# EAGLE board CT_schematic (EAGLE 7.6.0)

Size 100 x 80 mm. Coordinates in mm from the lower left corner, seen from the top.
Outline: 0,0 100,0 100,80 0,80 0,0
Copper layers (1*16): Top 0.035mm / dielectric 1.5mm / Bottom 0.035mm
Design rules "default": minimum track width 10mil, minimum drill 24mil, track to track 8mil, track to pad 8mil, pad to pad 8mil, via to via 8mil, smd to smd 8mil, copper to edge 40mil, drill to drill 8mil, minimum pad ring 10mil, minimum via ring 8mil, stop-mask expansion 4mil, vias tented up to drill 0mil, thermal gap 10mil

## Footprints (pad centres in the part's own frame; a part is rotated, then mirrored left to right if it is on the bottom)
C0603 = smd 0.8 x 0.8: 1 -0.762,0; 2 0.762,0
C0402 = smd 0.5 x 0.5: 1 -0.508,0; 2 0.508,0
C1210 = smd 1.2 x 2.5: 1 -1.524,0; 2 1.524,0
C1206 = smd 1.3 x 1.6: 1 -1.524,0; 2 1.524,0
L0603 = smd 0.8 x 0.8: 1 -0.762,0; 2 0.762,0
R0603 = smd 0.8 x 0.8: 1 -0.762,0; 2 0.762,0
UFQFPN32 = smd 0.6 x 0.3: 1 -2.35,1.75; 2 -2.35,1.25; 3 -2.35,0.75; 4 -2.35,0.25; 5 -2.35,-0.25; 6 -2.35,-0.75; 7 -2.35,-1.25; 8 -2.35,-1.75; 17 2.35,-1.75; 18 2.35,-1.25; 19 2.35,-0.75; 20 2.35,-0.25; 21 2.35,0.25; 22 2.35,0.75; 23 2.35,1.25; 24 2.35,1.75 | smd 0.3 x 0.6: 9 -1.75,-2.35; 10 -1.25,-2.35; 11 -0.75,-2.35; 12 -0.25,-2.35; 13 0.25,-2.35; 14 0.75,-2.35; 15 1.25,-2.35; 16 1.75,-2.35; 25 1.75,2.35; 26 1.25,2.35; 27 0.75,2.35; 28 0.25,2.35; 29 -0.25,2.35; 30 -0.75,2.35; 31 -1.25,2.35; 32 -1.75,2.35 | smd 3.45 x 3.45: EPAD 0,0
TDFN-8/6MM = smd 0.3 x 0.75: 1 0,0; 2 0.5,0; 3 1,0; 4 1.5,0; 5 1.5,3; 6 1,3; 7 0.5,3; 8 0,3
FCI_10118193-0001LF = smd 0.4 x 1.35: 1 -1.3,2.675; 2 -0.65,2.675; 3 0,2.675; 4 0.65,2.675; 5 1.3,2.675 | smd 1.6 x 1.4: 6 -3.2,2.45; 7 3.2,2.45 | smd 1.9 x 1.9: 8 -1.2,0; 9 1.2,0 | hole 0.5: -3.3,0; 3.3,0
SOT143B = smd 1 x 0.7: 1 -0.75,-1 | smd 0.6 x 0.7: 2 0.95,-1; 3 0.95,1; 4 -0.95,1
ASEK = smd 1.4 x 1: 1 -1.1,-0.8; 2 1.1,-0.8; 3 1.1,0.8; 4 -1.1,0.8
SOIC-8_EP = smd 1.6 x 0.533: 1 -2.921,1.905; 2 -2.921,0.635; 3 -2.921,-0.635; 4 -2.921,-1.905; 5 2.921,-1.905; 6 2.921,-0.635; 7 2.921,0.635; 8 2.921,1.905 | smd 2.54 x 3.302: EPAD 0,0 | drill 0.406 pad 0.406: P$1 -0.508,0.635; P$2 0.381,0.635; P$3 -0.508,-0.635; P$4 0.381,-0.635
DFN8_2X3MC = smd 0.813 x 0.305: 1 -1.398,0.75; 2 -1.398,0.25; 3 -1.398,-0.25; 4 -1.398,-0.75; 5 1.398,-0.75; 6 1.398,-0.25; 7 1.398,0.25; 8 1.398,0.75 | smd 1.753 x 1.549: 9 0,0
JST-2-SMD = smd 1 x 4.6: 1 -1,-3.7; 2 1,-3.7 | smd 1.6 x 3.4: NC1 -3.4,1.5; NC2 3.4,1.5
SON-6 = smd 0.55 x 0.3: 1 -0.355,0.5 | smd 0.52 x 0.3: 2 -0.37,0; 3 -0.37,-0.5; 4 0.37,-0.5; 5 0.37,0; 6 0.37,0.5
SW_4-1437565-2 = smd 1.4 x 2.1: 1 -2.23,4.55; 2 -2.23,-4.55; 3 2.23,4.55; 4 2.23,-4.55
LGM67K-G1J2-24-Z = smd 0.8 x 1.4: A -2,0; C 0,0
NC7SZ125M5X = smd 1.3 x 0.7: 1 -1.3,0.95; 2 -1.3,0; 3 -1.3,-0.95; 4 1.3,-0.95; 5 1.3,0.95

## Placement (x,y rotation side)
C1  1e-07  [C0603]  -19.05,44.45 0 top  (outside the outline)
C2  1e-07  [C0603]  -22.86,44.45 0 top  (outside the outline)
C3  1e-07  [C0603]  -26.67,44.45 0 top  (outside the outline)
C4  1e-07  [C0603]  -30.48,44.45 0 top  (outside the outline)
C5  4.7e-06  [C0603]  -15.24,44.45 0 top  (outside the outline)
C6  1e-08  [C0603]  -34.29,44.45 0 top  (outside the outline)
C7  1e-06  [C0603]  -38.1,44.45 0 top  (outside the outline)
C8  1e-08  [C0402]  -34.29,49.53 0 top  (outside the outline)
C9  1e-08  [C0402]  -38.1,49.53 0 top  (outside the outline)
C10  1e-05  [C1210]  -16.51,34.29 0 top  (outside the outline)
C11  1e-05  [C1210]  -22.86,34.29 0 top  (outside the outline)
C12  1e-05  [C1210]  -29.21,34.29 0 top  (outside the outline)
C13  1e-05  [C1210]  -35.56,34.29 0 top  (outside the outline)
C14  1e-07  [C0402]  -41.91,49.53 0 top  (outside the outline)
C15  1e-05  [C1206]  -41.91,33.02 0 top  (outside the outline)
C16  1e-05  [C1206]  -48.26,33.02 0 top  (outside the outline)
C17  1e-08  [C0402]  -45.72,49.53 0 top  (outside the outline)
F1  240.0  [L0603]  -41.91,44.45 0 top  (outside the outline)
R1  10000.0  [R0603]  -34.29,39.37 0 top  (outside the outline)
R2  1000.0  [R0603]  -45.72,44.45 0 top  (outside the outline)
R3  1600.5  [R0603]  -49.53,44.45 0 top  (outside the outline)
R4  4700.0  [R0603]  -53.34,44.45 0 top  (outside the outline)
R5  2200.0  [R0603]  -15.24,49.53 0 top  (outside the outline)
R6  2200.0  [R0603]  -19.05,49.53 0 top  (outside the outline)
R7  10000.0  [R0603]  -39.37,39.37 0 top  (outside the outline)
R8  4031.5447154472  [R0603]  -19.05,39.37 0 top  (outside the outline)
R9  2200.0  [R0603]  -22.86,49.53 0 top  (outside the outline)
R10  10000.0  [R0603]  -44.45,39.37 0 top  (outside the outline)
R11  10000.0  [R0603]  -49.53,39.37 0 top  (outside the outline)
R12  9100.0  [R0603]  -26.67,49.53 0 top  (outside the outline)
R13  680000.0  [R0603]  -24.13,39.37 0 top  (outside the outline)
R14  120000.0  [R0603]  -29.21,39.37 0 top  (outside the outline)
R15  2000.0  [R0603]  -30.48,49.53 0 top  (outside the outline)
R16  10000.0  [R0603]  -54.61,39.37 0 top  (outside the outline)
U1  STM32L052K8U6  [UFQFPN32]  -24.13,17.78 0 top  (outside the outline)
U2  24AA00T-I/MNY  [TDFN-8/6MM]  -39.37,16.51 0 top  (outside the outline)
U3  10118193-0001LF  [FCI_10118193-0001LF]  -48.26,16.51 0 top  (outside the outline)
U4  prtr5v0u2ax  [SOT143B]  -24.13,54.61 0 top  (outside the outline)
U5  ASEK-32.768KHz-ECST  [ASEK]  -29.21,26.67 0 top  (outside the outline)
U6  MIC5234YME  [SOIC-8_EP]  -36.83,25.4 0 top  (outside the outline)
U7  MCP73831T-2ACI/MC  [DFN8_2X3MC]  -34.29,53.34 0 top  (outside the outline)
U8  S2B-PH-SM4-TB(LF)(SN)  [JST-2-SMD]  -41.91,6.35 0 top  (outside the outline)
U9  TPS3895ADRYR  [SON-6]  -27.94,53.34 0 top  (outside the outline)
U10  4-1437565-2  [SW_4-1437565-2]  -27.94,6.35 0 top  (outside the outline)
U11  Q65110A2395  [LGM67K-G1J2-24-Z]  -45.72,26.67 0 top  (outside the outline)
U12  nc7sz125m5x  [NC7SZ125M5X]  -53.34,33.02 0 top  (outside the outline)

## Library data of the parts
C1-C17 F1 R1-R16 U1-U12 = circuit_tree

## Nets
CLK_U1_2: U1.2 U5.3
GND: C1.2 C2.2 C3.2 C4.2 C5.2 C6.2 C7.2 C8.2 C9.2 C10.2 C11.2 C12.2 C13.2 C14.2 C15.2 C16.2 C17.2 R2.2 R7.2 R9.2 R12.2 R14.2 R15.2 U1.EPAD U2.4 U3.5 U3.6 U3.7 U3.8 U3.9 U4.1 U5.2 U6.7 U6.EPAD U7.6 U7.9 U8.2 U9.2 U11.C U12.1 U12.3
INPUT_USBPOWER_5V: C15.1 R16.2 U3.1 U4.4 U7.1 U7.2
NET_U1_4: R4.1 U1.4 U12.4
NET_U1_5: C6.1 C7.1 F1.1 U1.5
NET_U1_28: R3.1 U1.28 U11.A
NET_U1_29: R5.1 U1.29 U2.6
NET_U1_30: R6.1 U1.30 U2.5
NET_U1_31: R7.1 U1.31
NET_U1_32: R1.1 U1.32 U10.3 U10.4
NET_U6_4: R8.2 R9.1 U6.4
NET_U7_5: R16.1 U7.5
NET_U7_8: R15.1 U7.8
NET_U9_1: R11.1 R12.1 U9.1
NET_U9_3: R13.2 R14.1 U9.3
NET_U9_4: R10.1 U9.4 U12.2
NET_U10_1: R2.1 U10.1 U10.2
PROC_USB_DM: U1.21 U3.2 U4.3
PROC_USB_DP: U1.22 U3.3 U4.2
VCC_S1_3V7: C10.1 C11.1 C16.1 U6.5 U6.8 U7.3 U7.4 U8.1
VCC_TIER1_3V3: C1.1 C2.1 C3.1 C4.1 C5.1 C8.1 C9.1 C12.1 C13.1 C14.1 C17.1 F1.2 R1.2 R3.2 R4.2 R5.2 R6.2 R8.1 R10.2 R11.2 R13.1 U1.1 U1.17 U2.8 U5.4 U6.1 U9.6 U12.5

## Tracks (layer width: path | path; a pad name or v marks a point on that pad's centre or on a via)
CLK_U1_2  (1 unrouted)
GND  (40 unrouted)
INPUT_USBPOWER_5V  (5 unrouted)
NET_U1_4  (2 unrouted)
NET_U1_5  (3 unrouted)
NET_U1_28  (2 unrouted)
NET_U1_29  (2 unrouted)
NET_U1_30  (2 unrouted)
NET_U1_31  (1 unrouted)
NET_U1_32  (3 unrouted)
NET_U6_4  (2 unrouted)
NET_U7_5  (1 unrouted)
NET_U7_8  (1 unrouted)
NET_U9_1  (2 unrouted)
NET_U9_3  (2 unrouted)
NET_U9_4  (2 unrouted)
NET_U10_1  (2 unrouted)
PROC_USB_DM  (2 unrouted)
PROC_USB_DP  (2 unrouted)
VCC_S1_3V7  (7 unrouted)
VCC_TIER1_3V3  (27 unrouted)